# Altium PCB CH32V205V-R0.PcbDoc (part 1 of 3)
Units mm, origin at the board's own origin, x right, y up, seen from the top; angles counter-clockwise.
Board outline 98 x 92 mm, 2 copper layers (Top Layer, Bottom Layer); 69 components, 110 nets, 401 pads, 975 vias.
Unrouted connection lines stored in the file: 82.
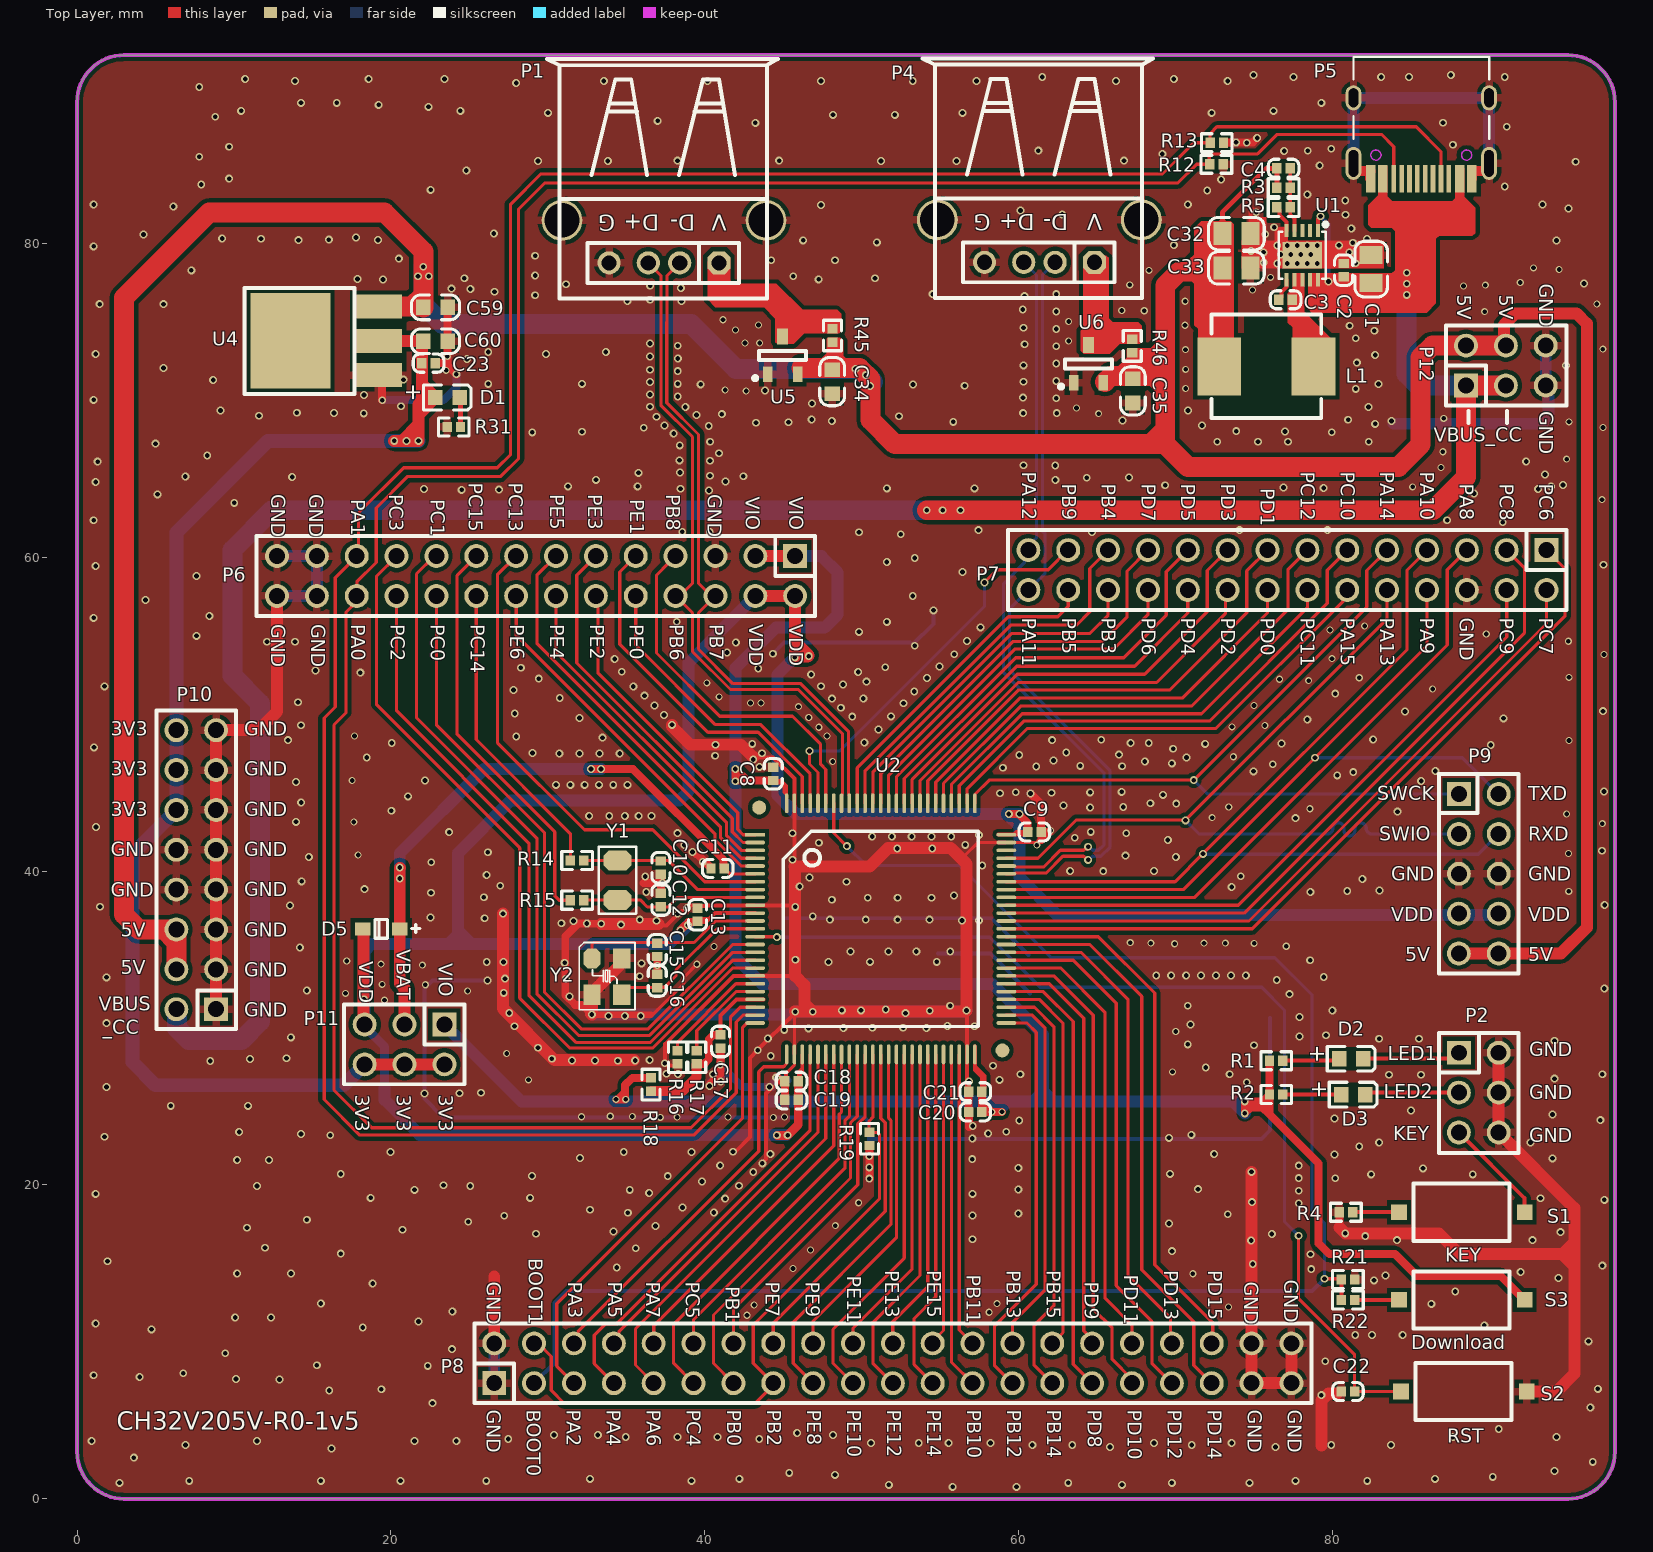
[diagram p0: Top Layer view]
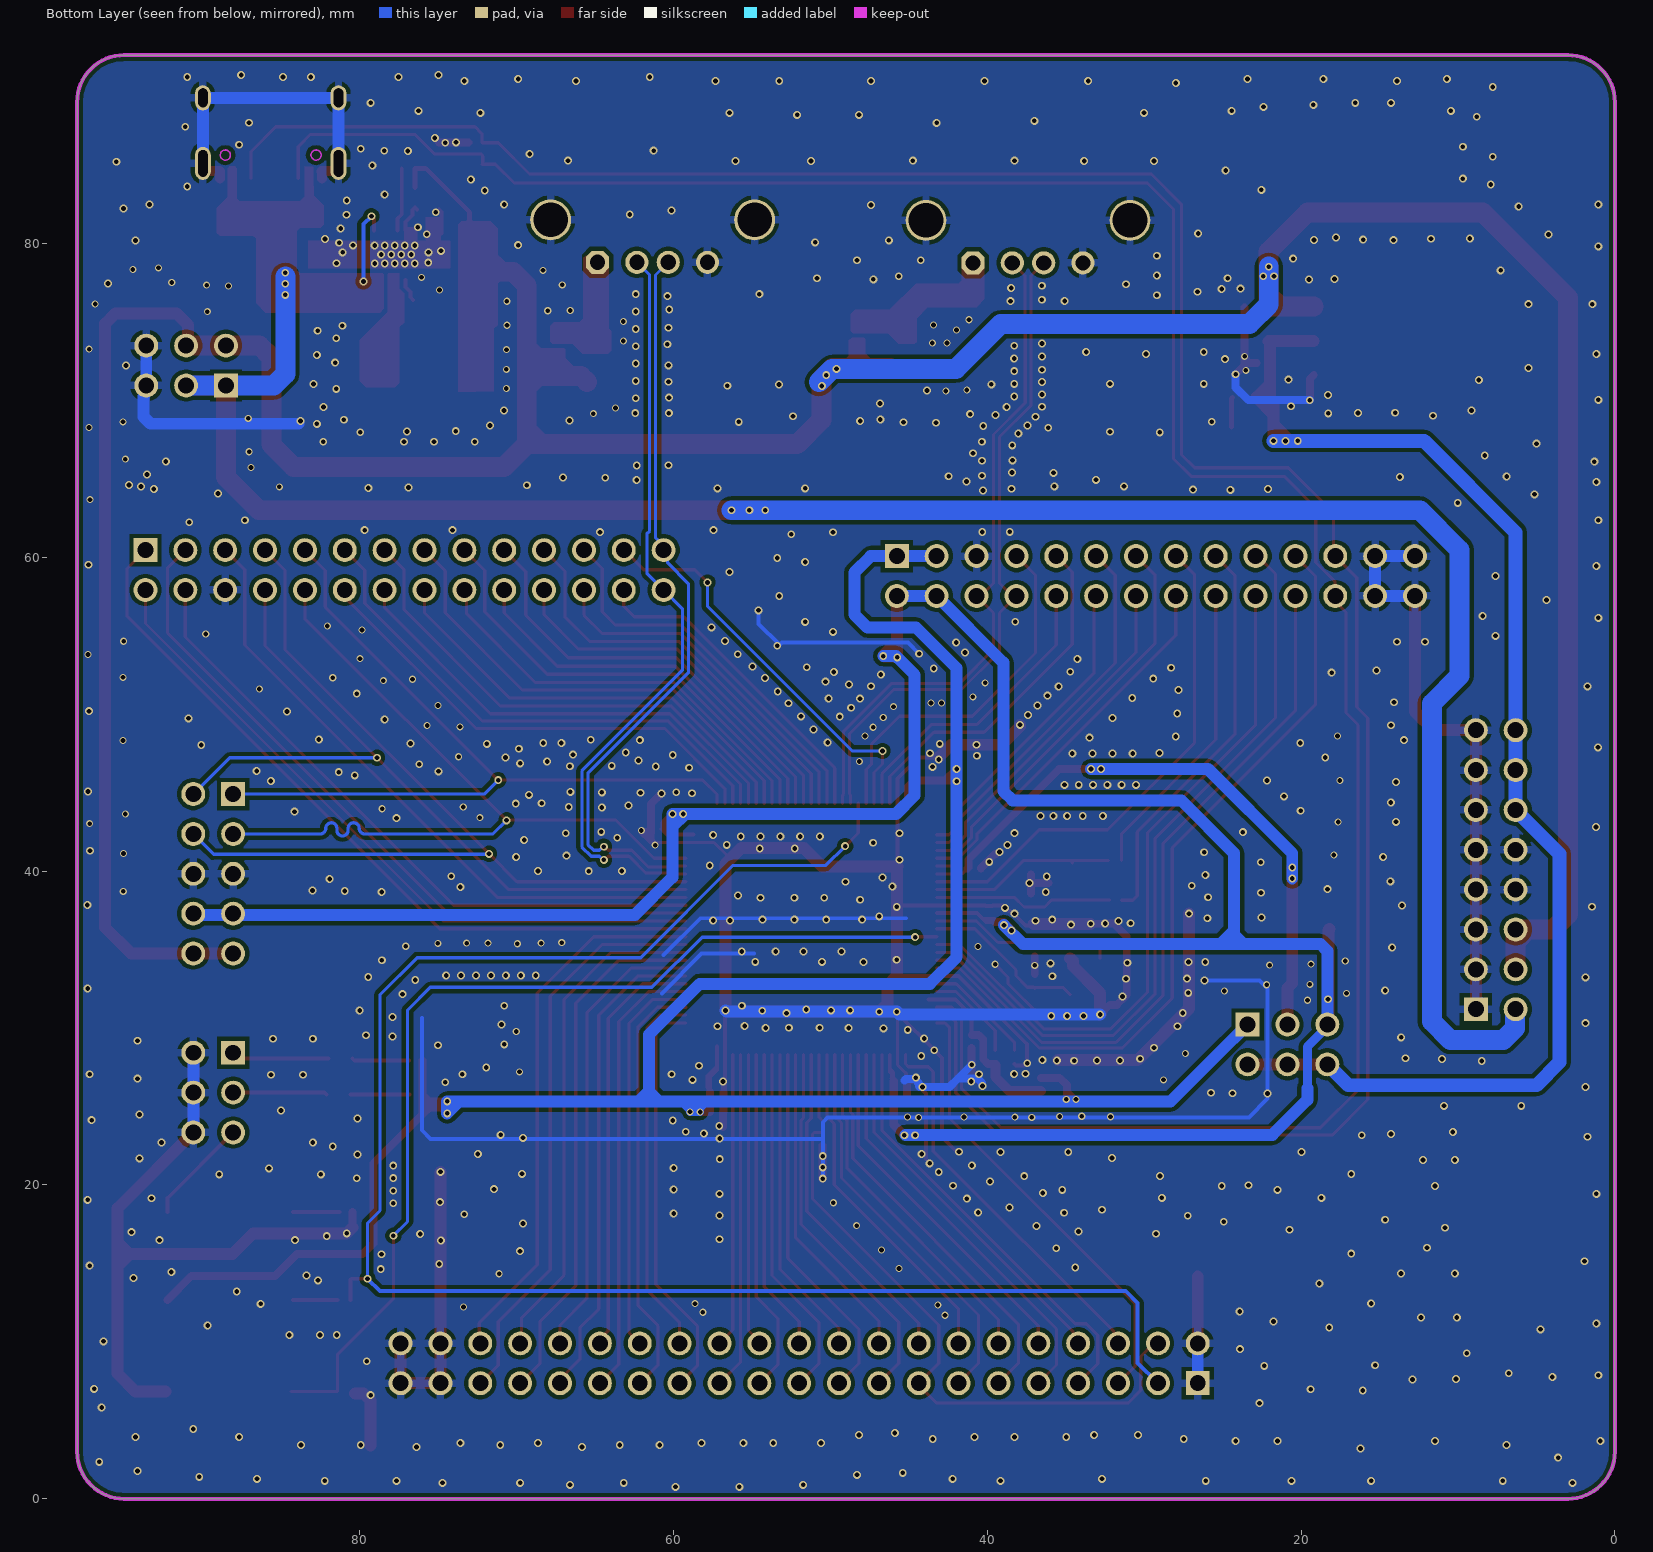
[diagram p1: Bottom Layer view, seen from below]

## Layer stack, top to bottom
Top Solder: solder mask 0.0102, Solder Resist, Dk 3.5
Top Layer: signal copper 0.0356
Dielectric 1: dielectric 0.32, FR-4, Dk 4.8
Bottom Layer: signal copper 0.0356
Bottom Solder: solder mask 0.0102, Solder Resist, Dk 3.5

## Board outline
0,3 0,89 cw(c3,89) 3,92 95,92 cw(c95,89) 98,89 98,3 cw(c95,3) 95,0 3,0 cw(c3,3)

## Design rules (kind name [scope] priority, off if disabled: settings)
Clearance Clearance_1 [InPolygon] p1: gap=0.254 ignorepadtopadclearanceinfootprint=FALSE
Clearance [All] p2: gap=0.152 ignorepadtopadclearanceinfootprint=FALSE except(0.203: Arc-Via Track-Via SMDPad-Via THPad-Via Via-Via Via-Fill Via-Poly Via-Region Via-Hole)
ComponentClearance [All] p1 off: gap=0.254 collisioncheckmode=3 verticalgap=0.254 showdistances=FALSE
DiffPairsRouting [All] p1: maxlimit=0.254 minlimit=0.178 mostfreqgap=0.203 toplayer_minwidth=0.152 toplayer_maxwidth=0.381 toplayer_prefwidth=0.203 bottomlayer_minwidth=0.152 bottomlayer_maxwidth=0.381 bottomlayer_prefwidth=0.203 maxuncoupledlength=12.7
HoleToHoleClearance [All] p1: gap=0.178 allowstackedmicrovias=TRUE
MinimumSolderMaskSliver [All] p1 off: minsoldermaskwidth=0.254
PolygonConnect PolygonConnect_1 [IsVia] p1: connectstyle=Direct reliefconductorwidth=0.254 reliefentries=4 polygonreliefangle="90 Angle" airgapwidth=0.254
PolygonConnect [All] p2: connectstyle=Relief reliefconductorwidth=0.508 reliefentries=4 polygonreliefangle="90 Angle" airgapwidth=0.254
RoutingVias [All] p1: holewidth=0.406 width=0.711 viastyle="Through Hole" minholewidth=0.3 minwidth=0.45 maxholewidth=0.711 maxwidth=1.27
SilkToSilkClearance [All] p1 off: silktosilkclearance=0.254
SilkToSolderMaskClearance [IsPad] p1 off: minsilkscreentomaskgap=0.254 clearancetoexposedcopper=TRUE
SolderMaskExpansion [All] p1: expansion=0.051 istentingtop=FALSE
Width [All] p1: maxlimit=2.54 minlimit=0.127 preferedwidth=0.254
24 further rules are at their usual default settings.

## Classes and differential pairs
differential pair NewDifferentialPair1: +PB7 -PB6
differential pair A: +PA12 -PA11

## Components (designator, comment, footprint, x,y, rotation, side; value= is the part's Value field where it differs from the comment)
C1 "NC(22uF/35V)" 0805_C 82.466,79.251 r270 top
C2 "NC(0.1uF)" 0402_C 80.713,78.718 r0 top
C3 "NC(100nF)" 0402_C 76.585,76.404 r90 top
C4 "NC(68pF)" 0402_C 76.458,84.786 r90 top
C8 "0.1uF" 0402_C 44.364,46.621 r0 top
C9 "0.1uF" 0402_C 60.583,42.494 r90 top
C10 "12pF" 0402_C 37.202,39.79 r180 top
C11 "0.1uF" 0402_C 40.399,40.174 r90 top
C12 "12pF" 0402_C 37.202,38.583 r0 top
C13 "0.1uF" 0402_C 39.546,36.792 r180 top
C15 "22pF" 0402_C 36.973,34.558 r180 top
C16 "22pF" 0402_C 36.973,33.426 r0 top
C17 "0.1uF" 0402_C 41.012,29.566 r0 top
C18 "0.1uF" 0402_C 45.104,26.609 r90 top
C19 "4.7uF" 0402_C 45.954,25.425 r270 top
C20 "4.7uF" 0402_C 57.663,24.653 r270 top
C21 "0.1uF" 0402_C 57.663,25.939 r270 top
C22 "0.1uF" 0402_C 80.559,6.833 r90 top
C23 "0.1uF" 0402_C 21.975,72.366 r90 top
C32 "NC(22uF)" 0805_C 74.77,80.621 r180 top
C33 "NC(22uF)" 0805_C 74.77,78.436 r180 top
C34 "10uF" 0603_C 48.121,71.957 r270 top
C35 "10uF" 0603_C 67.279,71.368 r270 top
C59 "10uF" 0603_C 22.073,75.922 r0 top
C60 "10uF" 0603_C 22.073,73.763 r0 top
D1 "RED" 0603+ 22.835,70.181 r0 top
D2 "BLUE" 0603+ 80.432,28.042 r0 top
D3 "RED" 0603+ 80.559,25.756 r0 top
D5 "B0520WS" SOD-323 20.562,36.322 r180 top
L1 "NC(4.7uH/5A)" IND-SMD_L7.0-W6.6 75.784,72.163 r180 top
P1 "USBHS" USBAF 40.903,78.759 r180 top locked
P2 "IO" IDC6-2.54mm 88.052,28.423 r270 top
P4 "USBFS" USBAF 64.826,78.792 r180 top locked
P5 "USBPD" TYPE-C-Receptacle-2.0 85.659,84.126 r180 top locked
P6 "" IDC28-2.54MM 45.761,60.071 r270 top
P7 "" IDC28-2.54MM 93.64,60.452 r270 top
P8 "HEADER 21x2" IDC42-2.54MM 26.584,7.366 r90 top locked
P9 "LINK" IDC10-2.54mm 88.052,34.747 r0 top
P10 "HEADER 8x2" IDC16-2.54mm 8.866,31.197 r180 top
P11 "HEADER 3x2" IDC6-2.54mm 23.409,30.226 r180 top
P12 "HEADER 3x2" IDC6-2.54mm 88.51,70.943 r0 top
R1 "1K" 0402 75.987,27.915 r0 top
R2 "1K" 0402 75.987,25.756 r0 top
R3 "NC(15K)" 0402 77.308,83.542 r180 top
R4 "10K" 0402 80.432,18.263 r0 top
R5 "NC(4.7K)" 0402 76.458,82.297 r0 top
R12 "NC(5.1K)" 0402 72.177,85.04 r0 top
R13 "NC(5.1K)" 0402 72.203,86.412 r0 top
R14 "NC(0R)" 0402 31.44,40.665 r0 top
R15 "NC(0R)" 0402 31.44,38.145 r0 top
R16 "0R" 0402 38.268,27.711 r90 top
R17 "0R" 0402 39.488,27.711 r90 top
R18 "0R" 0402 36.567,26.822 r270 top
R19 "10K" 0402 50.494,23.364 r270 top
R21 "10K" 0402 80.559,13.97 r0 top
R22 "1K" 0402 80.559,12.675 r0 top
R31 "1K" 0402 23.587,68.302 r0 top
R45 "NC(0Ω)" 0402 48.147,73.703 r90 top
R46 "NC(0Ω)" 0402 67.238,73.039 r90 top
S1 "KEY" SMD_6.1x3.65x2.5mm-KEY 92.242,18.263 r180 top
S2 "RST#" SMD_6.1x3.65x2.5mm-KEY 92.369,6.833 r180 top
S3 "Download" SMD_6.1x3.65x2.5mm-KEY 92.242,12.675 r180 top
U1 "NC(CH2024Q)" DFN10_3X3 78.078,79.249 r180 top
U2 "CH32V205V" LQFP100 43.215,42.321 r270 top locked
U4 "1117-3.3V" SOT-223 19.193,71.604 r90 top
U5 "CH213" SOT-23-3 44.014,71.66 r0 top
U6 "CH213" SOT-23-3 63.502,71.117 r0 top
Y1 "32768Hz" FC-135 34.433,40.665 r270 top
Y2 "8MHz" XT3225 32.812,34.431 r270 top

## Footprints (in the part's own frame and the unit in brackets; to place one, negate y for a bottom-side part, rotate by r counter-clockwise, add the part's x,y. Pads: shape width x height; smd on the part's side, far side on the other; paste and mask are expansions set on the pad)
0402 [mm]
  rect 0.6x0.65 smd mask+0.051: 1(0,0) 2(0.85,0)
  silkscreen extent -0.55,-0.58 1.4,0.57
0402_C [mm]
  rect 0.65x0.6 smd mask+0.051: 1(0,0) 2(0,-0.85)
  silkscreen extent -0.58,-1.4 0.57,0.55
0603+ [mm]
  rect 0.93x0.98 smd: 1(0,0) 2(1.54,0)
  silkscreen extent -0.76,-0.79 2.27,0.79
0603_C [mm]
  rect 0.93x0.98 smd mask+0.051: 1(0,0) 2(1.54,0)
  silkscreen extent -0.76,-0.79 2.31,0.79
0805_C [mm]
  rect 1.16x1.47 smd mask+0.051: 1(0,0) 2(1.78,0)
  silkscreen extent -0.88,-1.04 2.66,1.03
DFN10_3X3 [mm]
  rect 2.5x1.7 smd mask+0.051: 0(0,0)
  rect 0.25x0.85 smd mask+0.051: 1(-1,-1.575) 2(-0.5,-1.575) 3(0,-1.575) 4(0.5,-1.575) 5(1,-1.575) 6(1,1.575) 7(0.5,1.575) 8(0,1.575) 9(-0.5,1.575) 10(-1,1.575)
  silkscreen extent -1.57,-2.05 1.5,1.5
FC-135 [mil]
  oct 50x70 smd: 1(0,0) 2(98.43,0)
  silkscreen extent -35,-47 133,47
IDC6-2.54mm [mil]
  rect 60x60 hole 40: 1(0,0)
  round 60 hole 40: 2(0,100) 3(100,0) 4(100,100) 5(200,0) 6(200,100)
  silkscreen extent -50,-50 252,150
IDC10-2.54mm [mil]
  rect 60x60 hole 40: 1(0,400)
  round 60 hole 40: 2(100,400) 3(0,300) 4(100,300) 5(0,200) 6(100,200) 7(0,100) 8(100,100) 9(0,0) 10(100,0)
  silkscreen extent -50,-50 150,450
IDC16-2.54mm [mil]
  rect 60x60 hole 40: 1(0,0)
  round 60 hole 40: 2(100,0) 3(0,-100) 4(100,-100) 5(0,-200) 6(100,-200) 7(0,-300) 8(100,-300) 9(0,-400) 10(100,-400) 11(0,-500) 12(100,-500) 13(0,-600) 14(100,-600) 15(0,-700) 16(100,-700)
  silkscreen extent -50,-750 150,50
IDC28-2.54MM [mil]
  rect 60x60 hole 40: 1(0,0)
  round 60 hole 40: 2(100,0) 3(0,-100) 4(100,-100) 5(0,-200) 6(100,-200) 7(0,-300) 8(100,-300) 9(0,-400) 10(100,-400) 11(0,-500) 12(100,-500) 13(0,-600) 14(100,-600) 15(0,-700) 16(100,-700) 17(0,-800) 18(100,-800) 19(0,-900) 20(100,-900) 21(0,-1000) 22(100,-1000) 23(0,-1100) 24(100,-1100) 25(0,-1200) 26(100,-1200) 27(0,-1300) 28(100,-1300)
  silkscreen extent -50,-1351 150,50
IDC42-2.54MM [mil]
  rect 60x60 hole 40: 1(0,0)
  round 60 hole 40: 2(100,0) 3(0,-100) 4(100,-100) 5(0,-200) 6(100,-200) 7(0,-300) 8(100,-300) 9(0,-400) 10(100,-400) 11(0,-500) 12(100,-500) 13(0,-600) 14(100,-600) 15(0,-700) 16(100,-700) 17(0,-800) 18(100,-800) 19(0,-900) 20(100,-900) 21(0,-1000) 22(100,-1000) 23(0,-1100) 24(100,-1100) 25(0,-1200) 26(100,-1200) 27(0,-1300) 28(100,-1300) 29(0,-1400) 30(100,-1400) 31(0,-1500) 32(100,-1500) 33(0,-1600) 34(100,-1600) 35(0,-1700) 36(100,-1700) 37(0,-1800) 38(100,-1800) 39(0,-1900) 40(100,-1900) 41(0,-2000) 42(100,-2000)
  silkscreen extent -50,-2050 150,50
IND-SMD_L7.0-W6.6 [mm]
  rect 2.8x3.7 smd: 1(-3,0) 2(3,0)
  silkscreen extent -3.5,-3.3 3.5,3.3
LQFP100 [mm]
  round 0.889 smd: 0(-1.727,0.254) 0(13.746,15.748)
  rect 0.229x1.27 smd mask+0.051: 1(0,0)
  oval 0.229x1.27 smd mask+0.051: 2(0.5,0) 3(1,0) 4(1.5,0) 5(2,0) 6(2.5,0) 7(3,0) 8(3.5,0) 9(4,0) 10(4.5,0) 11(5,0) 12(5.5,0) 13(6,0) 14(6.5,0) 15(7,0) 16(7.5,0) 17(8,0) 18(8.5,0) 19(9,0) 20(9.5,0) 21(10,0) 22(10.5,0) 23(11,0) 24(11.5,0) 25(12,0) 51(12,16) 52(11.5,16) 53(11,16) 54(10.5,16) 55(10,16) 56(9.5,16) 57(9,16) 58(8.5,16) 59(8,16) 60(7.5,16) 61(7,16) 62(6.5,16) 63(6,16) 64(5.5,16) 65(5,16) 66(4.5,16) 67(4,16) 68(3.5,16) 69(3,16) 70(2.5,16) 71(2,16) 72(1.5,16) 73(1,16) 74(0.5,16) 75(0,16)
  oval 1.27x0.229 smd mask+0.051: 26(14,2) 27(14,2.5) 28(14,3) 29(14,3.5) 30(14,4) 31(14,4.5) 32(14,5) 33(14,5.5) 34(14,6) 35(14,6.5) 36(14,7) 37(14,7.5) 38(14,8) 39(14,8.5) 40(14,9) 41(14,9.5) 42(14,10) 43(14,10.5) 44(14,11) 45(14,11.5) 46(14,12) 47(14,12.5) 48(14,13) 49(14,13.5) 50(14,14) 76(-2,14) 77(-2,13.5) 78(-2,13) 79(-2,12.5) 80(-2,12) 81(-2,11.5) 82(-2,11) 83(-2,10.5) 84(-2,10) 85(-2,9.5) 86(-2,9) 87(-2,8.5) 88(-2,8) 89(-2,7.5) 90(-2,7) 91(-2,6.5) 92(-2,6) 93(-2,5.5) 94(-2,5) 95(-2,4.5) 96(-2,4) 97(-2,3.5) 98(-2,3) 99(-2,2.5) 100(-2,2)
  silkscreen extent -0.22,1.79 12.21,14.21
SMD_6.1x3.65x2.5mm-KEY [mm]
  rect 1x1 smd: 1(0,0) 2(8,0)
  silkscreen extent 0.98,-1.83 7.08,1.83
SOD-323 [mm]
  rect 1x0.83 smd: 1(0,0) 2(2.36,0)
  silkscreen extent -1.28,-0.6 1.58,0.6
SOT-23-3 [mm] "SOT-23-3"
  rect 0.6x1 smd: 1(0,0) 2(1.9,0)
  rect 0.7x1 smd: 3(0.95,2.4)
  silkscreen extent -0.93,-0.38 2.45,1.49
SOT-223 [mil]
  rect 60x120 smd: 1(0,0) 2(86,0) 3(172,0)
  rect 240x200 smd: ""(86,220)
  silkscreen extent -47,60 219,335
TYPE-C-Receptacle-2.0 [mm]
  oval 1x2.1 hole 0.6 slot 1.7 at 90 deg: 0(-4.32,-0.97) 0(4.32,-0.97)
  oval 1x1.6 hole 0.6 slot 1.2 at 90 deg: 0(-4.32,-5.15) 0(4.32,-5.15)
  rect 0.6x1.75 smd mask+0.051: A1(-3.225,0) A4(-2.45,0) B1(3.225,0) B4(2.45,0)
  rect 0.3x1.75 smd mask+0.051: A5(-1.25,0) A6(-0.25,0) A7(0.25,0) A8(1.25,0) B5(1.75,0) B6(0.75,0) B7(-0.75,0) B8(-1.75,0)
  Keep-Out Layer circle w0.1: c2.89,-1.5 r0.325
  Keep-Out Layer circle w0.1: c-2.89,-1.5 r0.325
  silkscreen extent -4.32,-7.75 4.32,-2.55
USBAF [mm]
  round 2.6 hole 2.2: 0(-3,-2.7) 0(10,-2.7)
  oct 1.473x1.473 hole 0.965: 1(0,0)
  round 1.473 hole 0.965: 2(2.5,0) 3(4.5,0) 4(7,0)
  silkscreen extent -3.75,-12.99 10.95,2.29
XT3225 [mm]
  oct 1.3x1.1 smd: 1(0,0)
  rect 1.3x1.1 smd: 2(2.3,0) 3(2.3,1.9) 4(0,1.9)
  silkscreen extent -1.02,-0.8 3.27,2.74

## Part data
C1 C4 C32 C33: library part "0603 100nF (104) 10% 50V", "贴片电容", Package=0603, SuppliersPartNumber=C14663, ComponentLink1Description=供应商链接, ComponentLink1URL=http://www.szlcsc.com/product/details_15331.html, Supplier=LC
C2 C8 C9 C10 C11 C12 C13 C15 C16 C17 C18 C19 C20 C21 C22 C23 C34 C35 C59 C60: library part CAP, "Capacitor"
C3: library part "0603 1uF (105) 10% 50V", "贴片电容", Package=0603, SuppliersPartNumber=C15849, ComponentLink1Description=供应商链接, ComponentLink1URL=http://www.szlcsc.com/product/details_16531.html, Supplier=LC
D1 D2 D3: library part LED0, "Typical INFRARED GaAs LED", LatestRevisionDate=08-Jul-2005, LatestRevisionNote="Mech Layer 1 removed.", PackageDescription="LED; 2 Leads", PackageReference=LED-0, Published=8-Jun-2000, Publisher="Altium Limited"
D5: library part DIODE, "Diode"
L1: library part INDUCTOR
P1 P4: library part USB, "USB Port"
P2: library part "HEADER 3x2", "Header, 3-Pin, Dual row"
P5: library part TYPE-C1
P6 P7: library part "HEADER 14x2", "Header, 14-Pin, Dual row"
P8: "Header, 21-Pin, Dual row"
P9: library part "HEADER 5x2", "Header, 5-Pin, Dual row"
P10: "Header, 8-Pin, Dual row"
P11 P12: "Header, 3-Pin, Dual row"
R1 R2 R3 R4 R5 R14 R15 R31 R45 R46: library part RES
R12 R13 R19 R21 R22: library part Res2, "Resistor"
  R19 R21 R22: LatestRevisionDate=17-Jul-2002, LatestRevisionNote="Re-released for DXP Platform.", PackageReference=AXIAL-0.4, Published=8-Jun-2000, Publisher="Altium Limited"
R16 R17 R18: library part R
S1 S2 S3: library part KEY1
U1: library part CH2024Q, "Step-Down DC-DC Converter, 28V input, FB 1.2V, 3A output"
U2: "RISC-V MCU, 192MHz, USB_480M, USB FS, PD, PIOC, ADC, TKEY, 2*OPA, 2*CMP"
U5 U6: library part CH213E, "Ideal Diode 5V*1A"
Y1 Y2: library part XTAL, "Crystal Oscillator", LatestRevisionDate=17-Jul-2002, LatestRevisionNote="Re-released for DXP Platform.", PackageDescription="Crystal, Thru-Hole; 2 Leads; Body 3.1 x 8.2 mm (Dia.xH)", PackageReference=R38, Published=8-Jun-2000, Publisher="Altium Limited"

## Via types
v1: diameter 0.5, hole 0.3, Top Layer to Bottom Layer, tented both sides, 745 vias
v2: diameter 0.45, hole 0.3, Top Layer to Bottom Layer, tented both sides, 120 vias
v3: diameter 0.508, hole 0.305, Top Layer to Bottom Layer, tented both sides, 110 vias

## Nets (pads, with @x,y where several pads share a name; then routed paths per layer and width w, separated by ;. In a path a pad name is that pad's centre, name@x,y a point inside that pad or via, vN(x,y) a via of type N, cw(c..) or ccw(c..) an arc to the next point about the centre after c; other vN are vias at no path point)
3V3: C23.1 C60.1 D1.1 P10.12 P10.14 P10.16 P11.2 P11.4 P11.6 U4.2 | length 90.2
  Top Layer w0.762: P11.6@18.329,27.686 P11.4@20.869,27.686 P11.2@23.409,27.686 ; U4.2@19.193,73.788 19.206,73.776 22.06,73.776 C60.1@22.073,73.763 21.992,73.682 21.992,72.382 C23.1@21.975,72.366 21.975,71.041 ; v1(20.209,67.413) 20.717,67.413 ; v1(20.998,67.41) 20.996,67.413 20.717,67.413 ; 20.717,67.413 21.758,68.454 ; 20.717,67.413 v1(21.758,67.413) 21.758,68.454 ; 21.758,68.454 21.758,69.095 ; 21.758,69.095 21.758,69.735 21.975,69.952 ; 21.758,69.095 21.773,69.095 22.835,70.156 D1.1@22.835,70.181 ; 21.975,69.952 22.205,70.181 D1.1@22.835,70.181 ; 21.975,69.952 21.975,71.041 ; 21.975,71.041 22.726,70.29 22.751,70.29 22.835,70.206 D1.1@22.835,70.181
  Bottom Layer w0.889: P11.6@18.329,27.686 16.995,26.351 5.009,26.351 3.532,27.828 3.532,41.103 P10.12@6.326,43.897 P10.14@6.326,46.437 P10.16@6.326,48.977 6.326,61.587 12.152,67.413 v1(21.758,67.413)
5V: C4.1 C32.2 C33.2 C34.1 C35.1 C59.1 L1.2 P9.9 P9.10 P10.4 P10.6 P12.2 P12.4 R3.2 R45.1 R46.1 U4.3 U5.2 U6.2 | length 252.9
  Top Layer w0.305: C32.2@72.792,81.24 72.99,81.438 ; C32.2@72.99,80.621 72.99,81.438 ; C32.2@73.198,81.254 72.99,81.461 ; R3.2@76.458,83.542 C4.1@76.458,84.778 ; C4.1@76.458,84.786 C4.1@76.458,84.778 ; 72.99,81.438 72.99,81.461 ; 72.99,81.461 72.99,81.986 75.782,84.778 C4.1@76.458,84.778
  Top Layer w0.762: P9.9@88.052,34.747 P9.10@90.592,34.747 94.555,34.747 96.206,36.398 96.206,74.883 95.548,75.541 91.664,75.541 90.921,74.797 P12.4@90.921,73.532
  Top Layer w1.27: P10.4@6.326,33.737 6.326,35.498 ; U4.3@19.193,75.973 21.336,75.973 ; 22.063,77.42 22.073,77.411 ; 22.063,78.233 22.073,78.224 ; C59.1@22.073,75.922 22.022,75.973 21.336,75.973 ; C59.1@22.073,75.973 22.073,76.709 ; U5.2@46.163,72.052 49.855,72.052 50.57,71.336 50.57,68.743 52.111,67.202 68.411,67.202 ; U6.2@65.491,71.158 65.885,71.552 68.6,71.552 ; 69.161,72.131 68.6,71.569 68.6,71.552 ; 71.968,79.198 70.962,78.192 ; 72.38,77.125 71.313,78.192 ; C33.2@72.99,78.436 72.99,78.391 72.935,78.336 72.091,78.336 71.946,78.192 71.313,78.192 ; C33.2@72.99,78.536 C32.2@72.99,80.521 ; P12.4@90.921,73.532 90.872,73.483 86.365,73.483 85.621,72.739 85.621,67.182 84.201,65.762 70.784,65.762 69.344,67.202 ; 5.547,36.277 P10.6@6.326,36.277 6.326,35.498 ; 5.547,36.277 3.95,36.277 2.99,37.238 2.99,76.533 8.423,81.967 19.594,81.967 22.073,79.488 22.073,78.224 ; 5.547,36.277 6.326,35.498 ; 21.336,75.973 22.073,76.709 ; 22.073,76.709 22.073,77.411 ; 22.073,77.411 22.073,78.224 ; 68.411,67.202 69.344,67.202 ; 68.411,67.202 69.344,68.135 ; 68.6,71.552 69.344,70.808 ; 69.344,67.202 69.344,68.135 ; 69.344,68.135 69.344,70.808 ; 69.344,70.808 69.344,77.316 70.22,78.192 70.962,78.192 ; 70.962,78.192 71.313,78.192
  Bottom Layer w1.27: v1(22.063,78.513) 22.063,76.092 23.301,74.855 39.14,74.855 41.992,72.003 v1(49.605,72.003) 49.879,72.003 50.73,71.152
  other v1: 50.537,70.917 50.254,71.602 21.733,77.903 22.412,77.903
BOOT0: P8.3 R21.1 R22.1 U2.94 | length 112.8
  Top Layer w0.203: U2.94@48.215,44.321 48.215,42.427 v1(49.054,41.588) ; v1(79.493,14.021) 80.509,14.021 R21.1@80.559,13.97
  Top Layer w0.254: R22.1@80.559,12.675 R21.1@80.559,13.97
  Bottom Layer w0.203: v1(49.054,41.588) 50.281,40.361 56.201,40.361 62.082,34.479 76.332,34.479 78.696,32.115 78.696,18.363 79.493,17.567 v1(79.493,14.021)
  Bottom Layer w0.254: P8.3@29.124,7.366 30.42,8.661 30.42,12.474 31.174,13.228 78.7,13.228 v1(79.493,14.021)
BOOT1: P8.4 P8.15 R19.1 U2.37 | length 44.1
  Top Layer w0.203: P8.4@29.124,9.906 29.378,9.906 30.217,9.068 30.217,6.909 31.029,6.096 43.221,6.096 44.364,7.239 P8.15@44.364,7.366 43.094,8.636 43.094,11.074 51.134,19.114 51.134,23.222 51.015,23.341 50.589,23.341 50.472,23.458 50.472,24.073 50.714,24.316 U2.37@50.714,28.321
CC1: P5.B5 P6.24 R12.1 U2.23 | length 158.6
  Top Layer w0.203: U2.23@43.215,31.321 42.259,31.321 41.647,30.709 41.647,26.162 39.124,23.639 18.774,23.639 16.371,26.042 16.371,49.317 17.136,50.081 17.136,56.488 17.821,57.174 P6.24@17.821,57.531 17.836,57.546 17.836,58.435 19.066,59.665 19.066,63.139 21.074,65.147 27.008,65.147 28.134,66.274 28.134,82.17 29.819,83.856 70.155,83.856 71.339,85.04 R12.1@72.177,85.04 72.152,85.066 72.152,85.574 72.279,85.701 75.225,85.701 76.47,86.945 83.125,86.945 83.909,86.161 P5.B5@83.909,84.126
CC2: P5.A5 P6.23 R13.1 U2.24 | length 163.7
  Top Layer w0.203: U2.24@43.215,30.821 42.437,30.821 42.002,30.386 42.002,25.876 39.301,23.175 18.015,23.175 15.747,25.443 15.747,49.752 16.45,50.454 16.45,58.699 P6.23@17.821,60.071 17.938,60.188 17.938,62.825 20.812,65.698 26.778,65.698 27.626,66.546 27.626,82.5 29.545,84.42 69.169,84.42 71.161,86.412 R13.1@72.203,86.412 72.203,86.996 72.635,87.428 85.335,87.428 86.909,85.853 P5.A5@86.909,84.126
FB: C4.2 R3.1 R5.2 U1.4 | length 4.1
  Top Layer w0.254: C4.2@77.308,84.786 R3.1@77.308,83.542 77.308,81.844 77.578,81.574 U1.4@77.578,80.824